# Altium PCB 100x100_3_czujniki_busbar.PcbDoc
Units mm, origin at the board's own origin, x right, y up, seen from the top; angles counter-clockwise.
Board outline 100 x 100 mm, 2 copper layers (Top Layer, Bottom Layer), stack 1.571 mm thick; 24 components, 15 nets, 94 pads, 12 vias.
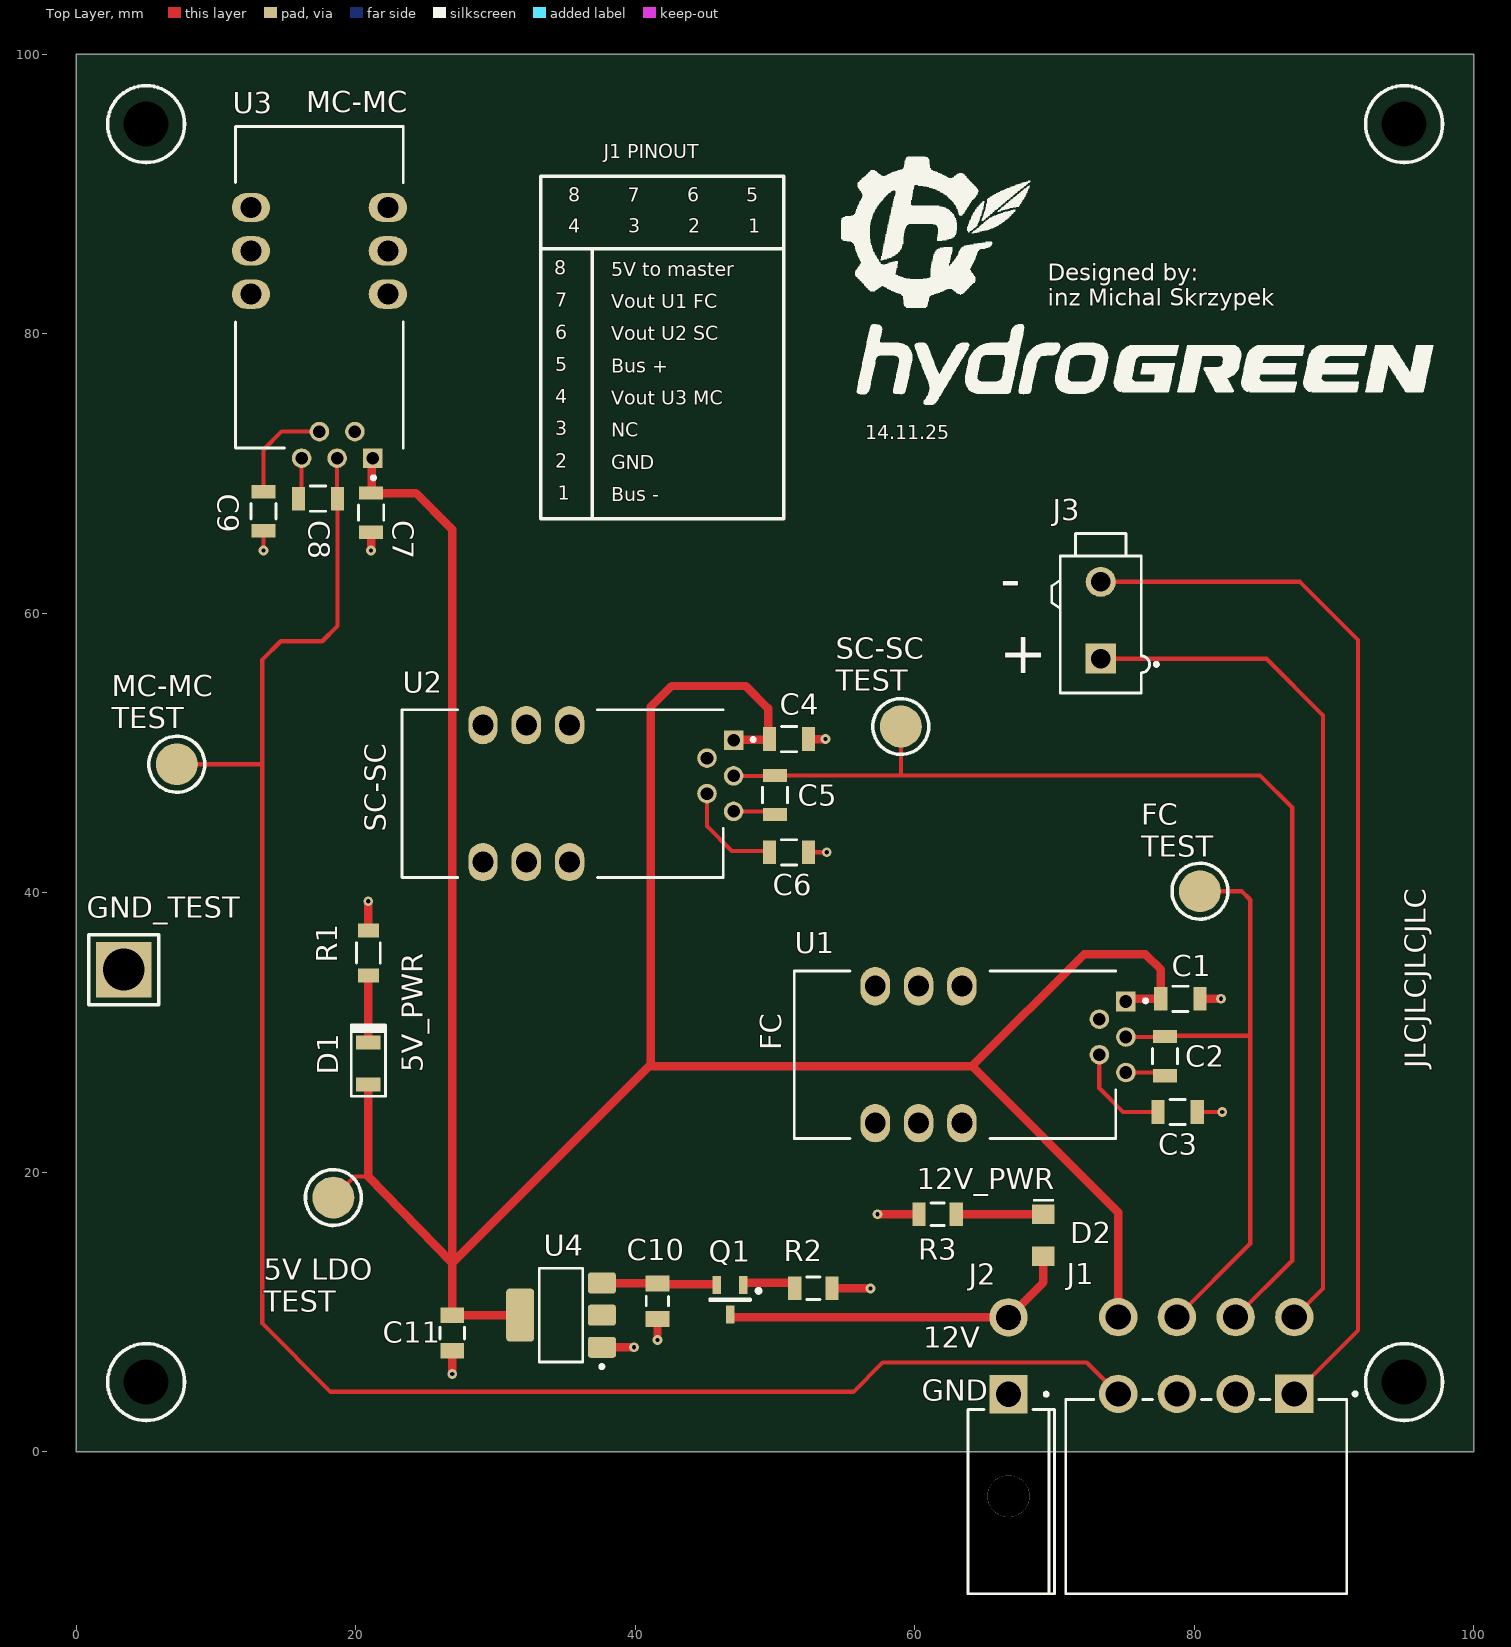
[diagram p0: Top Layer view]
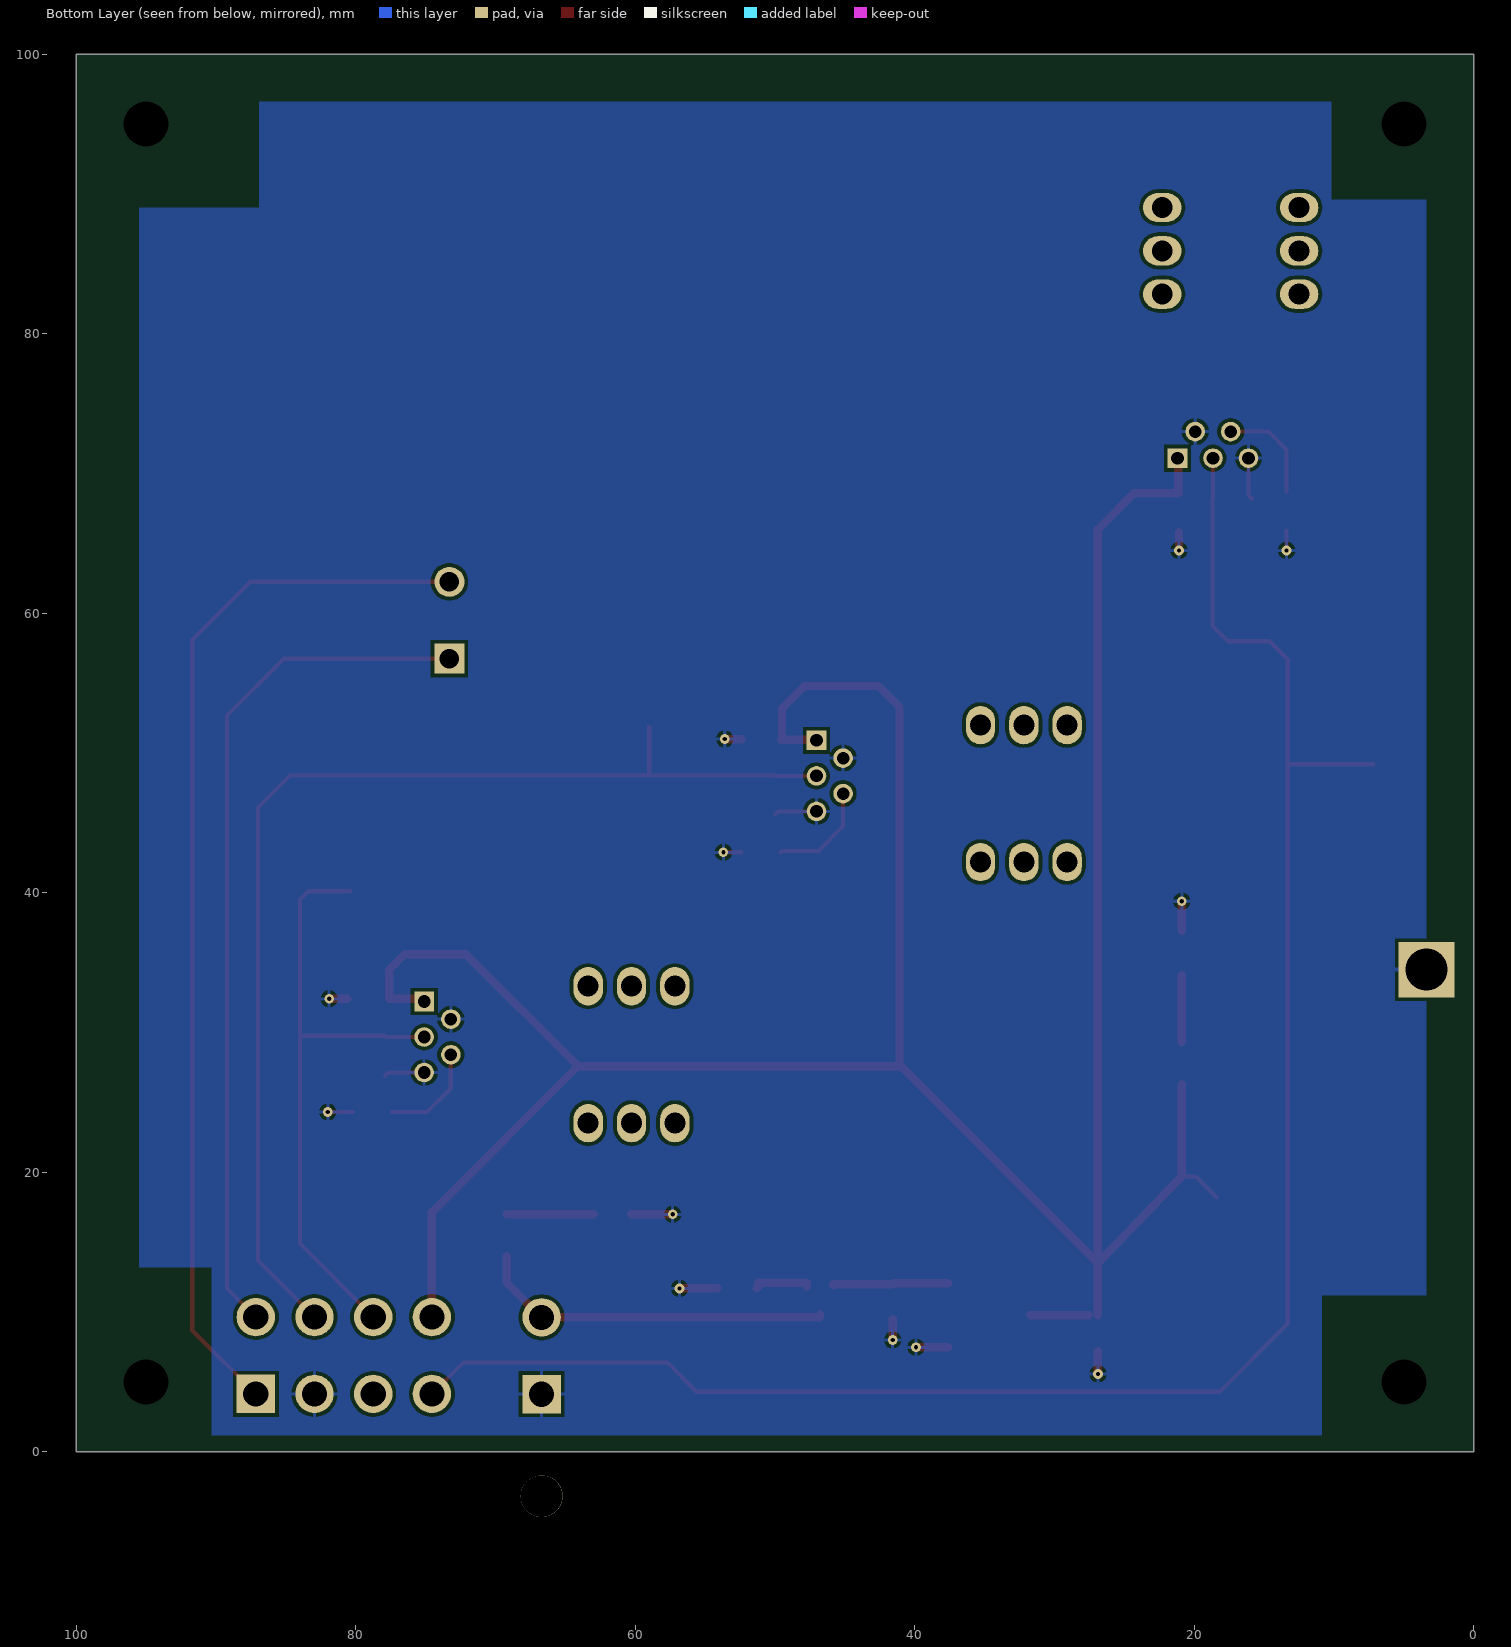
[diagram p1: Bottom Layer view, seen from below]
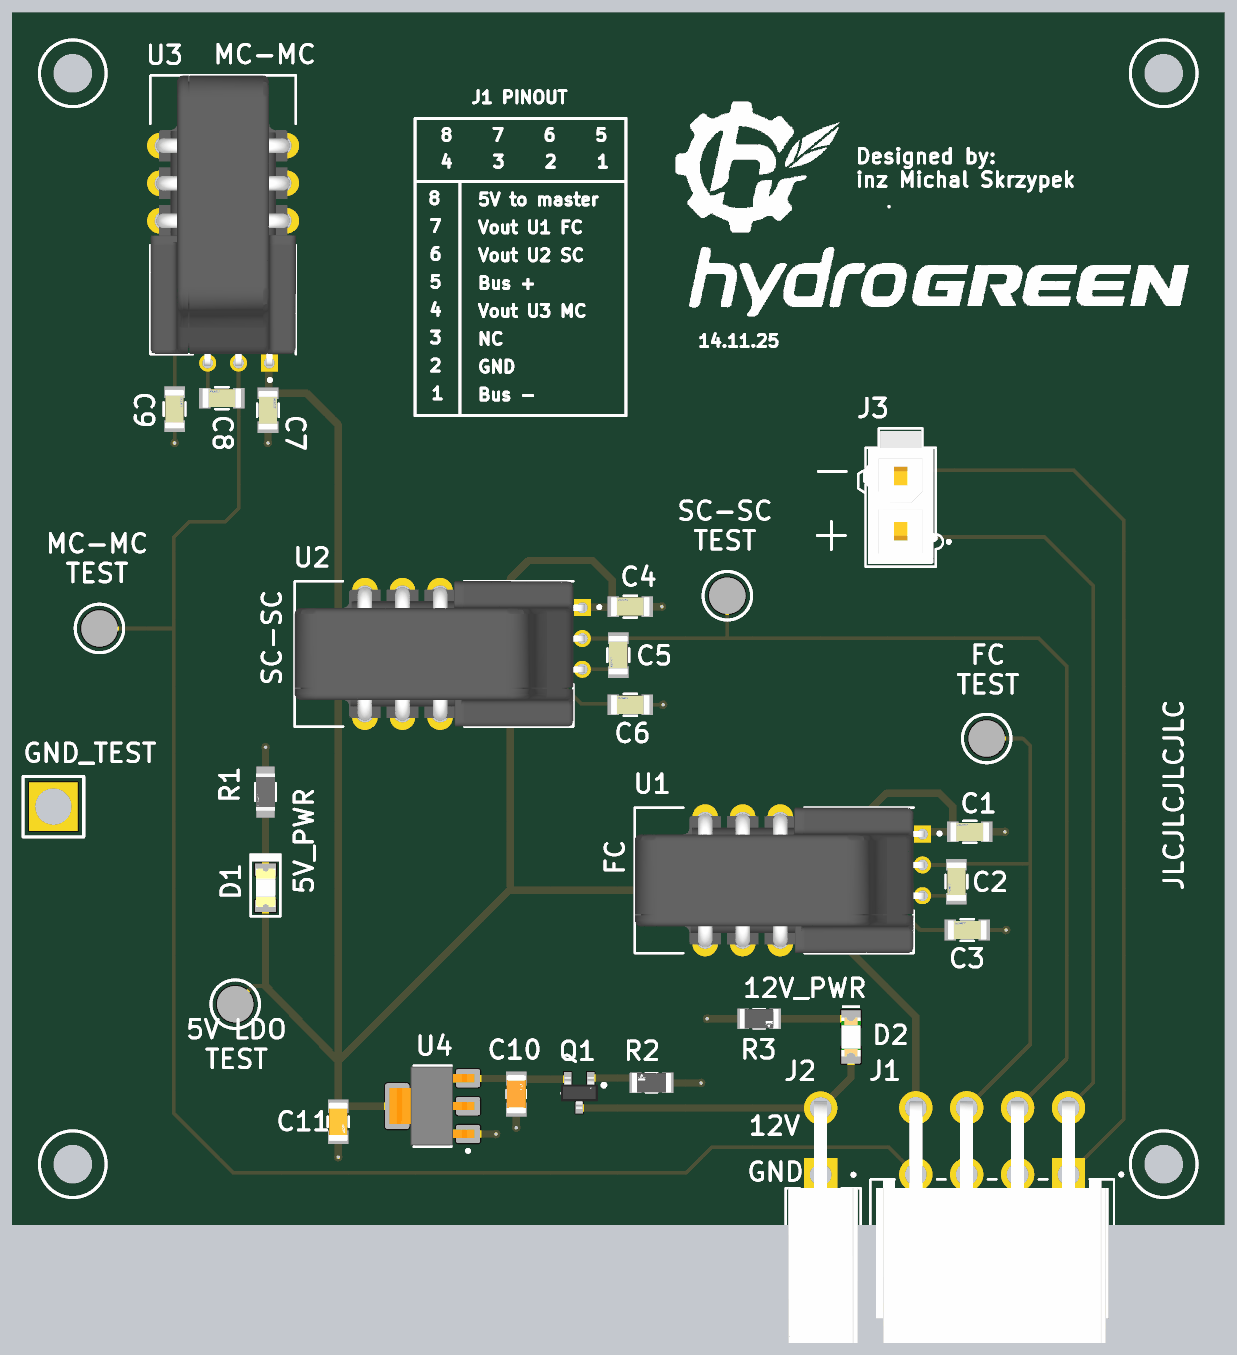
[diagram p2: 3D render of the assembled board from above, using the file's embedded part models]

## Layer stack, top to bottom
Top Solder: solder mask 0.0102, Solder Resist, Dk 3.5
Top Layer: signal copper 0.0356
Dielectric 1: dielectric 1.5, FR-4, Dk 4.8
Bottom Layer: signal copper 0.0356
Bottom Solder: solder mask 0.0102, Solder Resist, Dk 3.5

## Board outline
0,0 0,100 100,100 100,0

## Design rules (kind name [scope] priority, off if disabled: settings)
Clearance [All] p1: gap=0.254 ignorepadtopadclearanceinfootprint=FALSE
PolygonConnect [All] p1: connectstyle=Relief reliefconductorwidth=0.254 reliefentries=4 polygonreliefangle="90 Angle" airgapwidth=0.254
RoutingVias [All] p1: holewidth=0.3 width=0.7 viastyle="Through Hole" minholewidth=0.3 minwidth=0.7 maxholewidth=0.6 maxwidth=1.4
SolderMaskExpansion [All] p1: expansion=0.102 istentingtop=FALSE
SupplyNets "Schematic Supply Nets" [InNet('+12')] p1: voltage=0.000
SupplyNets "Schematic Supply Nets_3" [InNet('GND')] p2: voltage=0.000
Width [All] p1: maxlimit=0.6 minlimit=0.1 preferedwidth=0.3
30 further rules are at their usual default settings.

## Components (designator, comment, footprint, x,y, rotation, side; value= is the part's Value field where it differs from the comment)
C1 "47nF" FP-C1206C-EB-MFG 78.998,32.418 r0 top value="47,000 pF"
C2 "4.7 nF" FP-C1206C-EB-MFG 77.898,28.318 r90 top value="4,700 pF"
C3 "47nF" FP-C1206C-EB-MFG 78.798,24.318 r0 top value="47,000 pF"
C4 "47nF" FP-C1206C-EB-MFG 51,51 r0 top value="47,000 pF"
C5 "4.7 nF" FP-C1206C-EB-MFG 50,47 r90 top value="4,700 pF"
C6 "47nF" FP-C1206C-EB-MFG 51,42.9 r0 top value="47,000 pF"
C7 "47nF" FP-C1206C-EB-MFG 21.1,67.2 r270 top value="47,000 pF"
C8 "4.7 nF" FP-C1206C-EB-MFG 17.3,68.2 r0 top value="4,700 pF"
C9 "47nF" FP-C1206C-EB-MFG 13.4,67.3 r270 top value="47,000 pF"
C10 "10 uF" FP-CL31-IPC_C#1 41.585,10.787 r270 top value=10uF
C11 "22 uF" FP-CL31-IPC_C#2 26.9,8.5 r270 top
D1 "G_LED" LEDC3216X120N 20.9,27.8 r270 top
D2 "B_LED" WL-SMCW_1206_150120xx75000 69.2,15.5 r270 top
J1 "M-Fit-Jr 2x08" FP-87427-0802-MFG 80.85,-3 r0 top
J2 "M-Fit-Jr 2x01" FP-26-01-3114-MFG 66.901,-3.37 r0 top
J3 "M-Fit-Jr 2x01" FP-39-29-6028-MFG 73.3,60 r180 top
Q1 "GSF3407" GSF3407 46.785,10.887 r270 top
R1 "200" FP-AC1206-MFG 20.9,35.7 r270 top value=200Ω
R2 "750" FP-CRCW1206-e3-IPC_C 52.747,11.715 r180 top
R3 "750" FP-CRCW1206-e3-IPC_C 61.626,17 r0 top
U1 "HO 25-P" "HO 25-P" 62.868,28.418 r180 top
U2 "HO 25-P" "HO 25-P" 34.8,47.1 r180 top
U3 "HO 25-P" "HO 25-P" 17.4,83.33 r90 top
U4 "LDI1117-05H" LDI1117-05H 34.685,9.787 r180 top

## Footprints (in the part's own frame and the unit in brackets; to place one, negate y for a bottom-side part, rotate by r counter-clockwise, add the part's x,y. Pads: shape width x height; smd on the part's side, far side on the other; paste and mask are expansions set on the pad)
FP-26-01-3114-MFG [mm]
  rect 2.75x2.75 hole 1.8 paste-2539.97 mask+0: 1(-0.2,7.5)
  round 2.75 hole 1.8 paste-2539.97 mask+0: 2(-0.2,13)
  round 3 hole 3 unplated paste-2539.97 mask+0: ""(-0.2,0.2)
  silkscreen extent -3.09,-6.78 3.09,7.62, body extent -3.19,-6.88 3.19,14.48, height 0.25
FP-39-29-6028-MFG [mm]
  rect 2.15x2.15 hole 1.4 paste-2539.97 mask+0: 1(0,3.25)
  round 2.15 hole 1.4 paste-2539.97 mask+0: 2(0,-2.25)
  silkscreen extent -4.1,-5.7 3.5,5.7, body extent -3.6,-5.8 3.6,5.8, height 0.25
FP-87427-0802-MFG [mm]
  rect 2.75x2.75 hole 1.8 paste-2539.97 mask+0: 1(6.3,7.15)
  round 2.75 hole 1.8 paste-2539.97 mask+0: 2(2.1,7.15) 3(-2.1,7.15) 4(-6.3,7.15) 5(6.3,12.65) 6(2.1,12.65) 7(-2.1,12.65) 8(-6.3,12.65)
  silkscreen extent -10.05,-7.15 10.78,7.27, body extent -10.15,-7.25 10.15,14.13, height 0.25
FP-AC1206-MFG [mm]
  rect 1x1.5 smd paste+0 mask+0: 1(-1.6,0) 2(1.6,0)
  silkscreen extent -0.72,-0.85 0.72,0.85, body extent -2.2,-0.95 2.2,0.95, height 0.25
FP-C1206C-EB-MFG [mm]
  rect 0.95x1.7 smd paste+0 mask+0: 1(-1.4,0) 2(1.4,0)
  silkscreen extent -0.55,-0.9 0.55,0.9, body extent -2,-1 2,1, height 0.25
FP-CL31-IPC_C#1 [mm]
  rect 1.154x1.706 smd paste+0 mask+0: 1(-1.276,0) 2(1.276,0)
  silkscreen extent -0.32,-0.8 0.32,0.8, body extent -1.95,-1 1.95,1, height 0.25
FP-CL31-IPC_C#2 [mm]
  rect 1.105x1.658 smd paste+0 mask+0: 1(-1.276,0) 2(1.276,0)
  silkscreen extent -0.42,-0.87 0.42,0.87, body extent -1.93,-0.97 1.93,0.97, height 0.25
FP-CRCW1206-e3-IPC_C [mm]
  rect 0.956x1.658 smd paste+0 mask+0: 1(-1.326,0) 2(1.326,0)
  silkscreen extent -0.47,-0.8 0.47,0.8, body extent -1.9,-0.97 1.9,0.97, height 0.25
GSF3407 [mm] "P-Channel 30 V 4.1A (Ta) 1.2W (Ta) Surface Mount SOT-23"
  rect 1.3x0.6 smd: 1(-1.05,0.95) 2(-1.05,-0.95) 3(1.05,0)
  silkscreen extent -0.76,-1.46 0.05,2.16, body extent -1.32,-1.52 1.32,1.52, height 1.12
"HO 25-P" [mm] "Current Sensor 25A 1 Channel Hall Effect, Open Loop Bidirectional Module, Single Pass Through"
  rect 1.4x1.4 hole 0.9 paste-2539.97 mask+0: 1(-12.235,-3.81)
  round 1.4 hole 0.9 paste-2539.97 mask+0: 2(-10.33,-2.54) 3(-12.235,-1.27) 4(-10.33,0) 5(-12.235,1.27)
  rrect100% 2.1x2.74 hole 1.5 paste-2539.97 mask+0: 6(-0.5,4.9) 7(2.6,4.9) 8(5.7,4.9) 9(-0.5,-4.9) 10(2.6,-4.9) 11(5.7,-4.9)
  silkscreen extent -13.76,-6 11.5,6, body extent -13.03,-6.37 11.6,6.37, height 0.25
LDI1117-05H [mm] "SOT223, 4-Leads"
  rrect25% 2x1.5 smd: 1(-2.925,2.3) 2(-2.925,0) 3(-2.925,-2.3)
  rrect25% 2x3.8 smd: 4(2.925,0)
  silkscreen extent -3.05,-3.35 1.55,3.81, body extent -3.44,-3.26 3.56,3.24, height 1.64
LEDC3216X120N [mm]
  rect 1x1.75 smd: 1(1.5,0) 2(-1.5,0)
  silkscreen extent -2.75,-1.22 2.35,1.22, body extent -1.6,-0.79 1.6,0.81, height 1.1
WL-SMCW_1206_150120xx75000 [mm] "SMD Mono-color Chip LED, body 3.2x1.6mm"
  rect 1.4x1.6 smd: 1(-1.5,0) 2(1.5,0)
  silkscreen extent -2.6,-0.75 -2.4,0.75, body extent -1.6,-0.8 1.6,0.8, height 0.68

## Part data
C1 C3 C4 C6 C7 C9: library part CMP-1037-03993-2, "0.047 µF ±5% 100V Ceramic Capacitor X7R 1206 (3216 Metric) C1206C473J1RACTU", Capacitance="47,000 pF", Manufacturer=KEMET, Manufacturer Part Number=C1206C473J1RACTU, Package=C1206C-EB, Temperature="-55°C to +150°C", Temperature Characteristic=X7R, Temperature Coefficient=15%, Temperature Range High=+150°C, Temperature Range Low=-55°C, Tolerance=0.05, Voltage Rating="100 V", Automotive=Yes, Automotive Grade="Grade 0", Category=Cap, ComponentLink2Description=Datasheet, ComponentLink2URL=https://content.kemet.com/datasheets/KEM_C1007_X8R_ULTRA_150C_SMD.pdf, Device Class L1="Passive Components", Device Class L2=Capacitors, Device Class L3="Ceramic Capacitors", Digikey Description="CAP CER 0.047UF 100V X7R 1206", Height=0.88mm, Ipc Land Pattern Name=CAPC320160X78, Lead Free=Yes, Material=Ceramic, Mouser Description="Multilayer Ceramic Capacitors MLCC - SMD/SMT 100volts 47000pF X7R 5%", Octopart=https://octopart.com/c1206c473j1ractu-kemet-8206881, RoHS=TRUE
C2 C5 C8: library part CMP-03020-033478-1, "4700 pF ±5% 100V Ceramic Capacitor X7R 1206 (3216 Metric) C1206C472J1RACTU", Capacitance="4,700 pF", Manufacturer=KEMET, Manufacturer Part Number=C1206C472J1RACTU, Package=C1206C-EB, Temperature="-55°C to +150°C", Temperature Characteristic=X7R, Temperature Coefficient=15%, Temperature Range High=+150°C, Temperature Range Low=-55°C, Tolerance=0.05, Voltage Rating="100 V", Automotive=Yes, Automotive Grade="Grade 0", Category=Cap, ComponentLink2Description=Datasheet, ComponentLink2URL=https://content.kemet.com/datasheets/KEM_C1007_X8R_ULTRA_150C_SMD.pdf, Device Class L1="Passive Components", Device Class L2=Capacitors, Device Class L3="Ceramic Capacitors", Digikey Description="CAP CER 4700PF 100V X7R 1206", Height=0.88mm, Ipc Land Pattern Name=CAPC320160X78, Lead Free=Yes, Material=Ceramic, Mouser Description="Multilayer Ceramic Capacitors MLCC - SMD/SMT 100volts 4700pF X7R 5%", Octopart=https://octopart.com/c1206c472j1ractu-kemet-4496506, RoHS=TRUE
C10: library part CMP-13271-000016-1, "10 µF ±10% 50V Ceramic Capacitor X5R 1206 (3216 Metric), CL31A106KBHNNNE", Capacitance=10uF, Manufacturer=Samsung, Manufacturer Part Number=CL31A106KBHNNNE, Package=CL31, Temperature="-55°C to +85°C", Temperature Characteristic=X5R, Temperature Coefficient=15%, Temperature Range High=+85°C, Temperature Range Low=-55°C, Tolerance=10%, Voltage=50V, Automotive=No, Category=Cap, ComponentLink2Description=Datasheet, ComponentLink2URL=http://www.samsungsem.com/kr/support/product-search/mlcc/__icsFiles/afieldfile/2018/06/21/CL31A106KBHNNNE.pdf, Device Class L1="Passive Components", Device Class L2=Capacitors, Device Class L3="Ceramic Capacitors", Digikey Description="CAP CER 10UF 50V X5R 1206", Height=1.8mm, Ipc Land Pattern Name=CAPC320160X160, Lead Free=Yes, Material=Ceramic, Octopart=https://octopart.com/cl31a106kbhnnne-samsung-19832778, RoHS=TRUE, Voltage Rating=50V
C11: library part CMP-13271-002604-1, "22 µF ±10% 16V Ceramic Capacitor X5R 1206 (3216 Metric), CL31A226KOHNNNE", Capacitance=22uF, Case Code (Imperial)=1206, Case Code (Metric)=3216, Dielectric=X5R, Max Operating Temperature=85°C, Min Operating Temperature=-55°C, Package Quantity=1, Tolerance=10%, Voltage Rating=16V, Case/Package=1206, Depth=1.6mm, Height=1.6mm, Lead Free="Lead Free", Length=3.2mm, Mount="Surface Mount", Packaging="Tape and Reel", Radiation Hardening=No, Thickness=0.071inch, Voltage Rating (DC)=16V, Width=0.063inch
D1: library part LTST-C230KGKT, "Green 571nm LED Indication - Discrete 2V 1206 (3216 Metric)", Case Code (Imperial)=1206, Case Code (Metric)=3216, Color=Green, Forward Current=30mA, Forward Voltage=2V, Lens Color="Clear, Colorless", Manufacturer=Lite-On, Max Operating Temperature=85°C, Min Operating Temperature=-55°C, Power Dissipation=75mW, Reverse Voltage=5V, Supplier Part Number=6921105P, Supplier Part Number 1=160-1456-1-ND, Test Current=20mA, Case/Package=1206, Category=LEDs, China RoHS=Compliant, ComponentLink1Description=https://datasheet.octopart.com:443/LTST-C230KGKT-Lite-On-datasheet-43775839.pdf?src-supplier=ODG+(Origin+Data+Global), ComponentLink1URL=https://datasheet.octopart.com:443/LTST-C230KGKT-Lite-On-datasheet-43775839.pdf?src-supplier=ODG+(Origin+Data+Global), ComponentLink2Description=https://datasheet.octopart.com:443/LTST-C230KGKT-Lite-On-datasheet-158343.pdf?src-supplier=Jameco, ComponentLink2URL=https://datasheet.octopart.com:443/LTST-C230KGKT-Lite-On-datasheet-158343.pdf?src-supplier=Jameco, ComponentLink3Description=https://datasheet.octopart.com:443/LTST-C230KGKT-Lite-On-datasheet-83115.pdf?src-supplier=Future+Electronics, ComponentLink3URL=https://datasheet.octopart.com:443/LTST-C230KGKT-Lite-On-datasheet-83115.pdf?src-supplier=Future+Electronics, ComponentLink4Description=https://datasheet.octopart.com:443/LTST-C230KGKT-Lite-On-datasheet-26684764.pdf?src-supplier=Future+Electronics, ComponentLink4URL=https://datasheet.octopart.com:443/LTST-C230KGKT-Lite-On-datasheet-26684764.pdf?src-supplier=Future+Electronics, ComponentLink5Description=https://datasheet.octopart.com:443/LTST-C230KGKT-Lite-On-datasheet-165573808.pdf?src-supplier=TME, ComponentLink5URL=https://datasheet.octopart.com:443/LTST-C230KGKT-Lite-On-datasheet-165573808.pdf?src-supplier=TME, ComponentLink6Description=https://datasheet.octopart.com:443/LTST-C230KGKT-Lite-On-datasheet-13697501.pdf?src-supplier=_legacy+Avnet, ComponentLink6URL=https://datasheet.octopart.com:443/LTST-C230KGKT-Lite-On-datasheet-13697501.pdf?src-supplier=_legacy+Avnet, ComponentLink7Description=https://datasheet.octopart.com:443/LTST-C230KGKT-Lite-On-datasheet-11795789.pdf?src-supplier=Arrow+Electronics, ComponentLink7URL=https://datasheet.octopart.com:443/LTST-C230KGKT-Lite-On-datasheet-11795789.pdf?src-supplier=Arrow+Electronics, Depth=1.6mm, Dominant Wavelength=571nm, Height=1.1mm, Illumination Color=Green, Lead Free="Lead Free", Length=3.2mm, Lens Style=Clear, Lens Transparency=Clear, Lifecycle Status=Production, Luminous Intensity=35mcd, Manufacturer Part Number=LTST-C230KGKT, Mounting Technology="Surface Mount", Number of Circuits=1, Number of Elements=1, Number of LEDs=1, Number of Terminals=2, Peak Wavelength=574nm, Power Rating=75mW, Radiation Hardening=No, REACH SVHC=Yes, RoHS=Compliant, Schedule B="8541402000, 8541402000|8541402000, 8541402000|8541402000|8541402000, 8541402000|8541402000|8541402000|8541402000", Shape=Rectangular, Stock=6300, Supplier=RS, Supplier 1=DigiKey, Terminal Pitch=3.6mm, Viewing Angle=130°, Wavelength=574nm, Width=1.6mm
D2: library part CMP-1426-00015-3, "Blue 470nm LED Indication - Discrete 3.2V 1206 (3216 Metric), 150120BS75000", Case Code (Imperial)=1206, Case Code (Metric)=3216, Color=Blue, Forward Current=100mA, Forward Voltage=3.2V, Manufacturer Package Identifier=LED_1206, Max Operating Temperature=85°C, Max Reverse Voltage (DC)=5V, Min Operating Temperature=-40°C, Test Current=20mA, Case/Package=1206, Dominant Wavelength=470nm, Height=680µm, Length=3.2mm, Lens Style="Clear, Rectangular", Luminous Intensity=145mcd, Mount="Surface Mount", Packaging="Tape and Reel", Peak Wavelength=465nm, REACH SVHC=Unknown, RoHS=Compliant, Viewing Angle=140°, Wavelength=470nm, Width=1.6mm
J1: library part CMP-00257-00773328-1, "Connector Header Through Hole, Right Angle 8 position 0.165\" (4.20mm) 87427-0802", Case/Package=0802, Color=Natural, Current Rating=8A, Flammability Rating="UL94 V-0", Insulation Resistance=1GΩ, Manufacturer Lifecycle Status=ACTIVE, Max Operating Temperature=105°C, Min Operating Temperature=-40°C, Voltage Rating=600V, Contact Gender=Male, Contact Material=Brass, Contact Plating=Tin, Country of Origin=IN, Depth=19.4mm, Gender=Male, Glow Wire Compliant=Non-compliant, Housing Material=Nylon, Lead Pitch=4.2mm, Length=19.2mm, Lifecycle Status=Production, Mount="Through Hole", NexarPartId=773328, Number of Circuits=8, Number of Contacts=8, Number of Pins=8, Number of Ports=1, Number of Positions=8, Number of Rows=2, Number of Terminals=8, Orientation="Right Angle, Vertical", Pitch=4.2mm, Plating=Tin, Radiation Hardening=No, REACH SVHC=Unknown, RoHS=Compliant, Row Spacing=4.2mm, Schedule B=8536694040, Termination=Solder, Voltage Rating (DC)=600V
J2: library part CMP-04776-000291-1, "Connector Header Through Hole, Right Angle 2 position, molex mini fit jr 26-01-3114", Current Rating=13A, Flammability Rating="UL94 V-2", Max Operating Temperature=105°C, Min Operating Temperature=-40°C, Package Quantity=2280, Voltage Rating=600V, Contact Gender=Male, Contact Material=Brass, Contact Plating=Gold, Depth=19.93mm, ELV=Compliant, Halogen Free="Low Halogen", Housing Material=Nylon, Length=5.4mm, Material=Brass, Mount="Through Hole", Number of Ports=1, Number of Positions=2, Number of Rows=2, Number of Terminals/Pins=2, Orientation="Right Angle", Packaging=Bulk, Pitch=4.2mm, Row Spacing=4.2mm, Series=5569, Termination="Through Hole"
J3: library part CMP-04776-000768-1, "39-29-6028 Connector Header Through Hole 2 position", Contact Resistance=10mR, Current Rating=9A, Max Operating Temperature=105°C, Max Voltage Rating (DC)=600.6kV, Min Operating Temperature=-40°C, Voltage Rating=600V, Contact Gender=Male, Contact Material=Brass, Contact Plating=Gold, Gender=Male, Glow Wire Compliant=Non-compliant, Halogen Free="Low Halogen", Housing Material=Nylon, Lead Free="Lead Free", Mount="Through Hole", Number of Circuits=2, Number of Contacts=2, Number of Positions=2, Number of Rows=2, Orientation=Straight, Packaging=Bulk, Pitch=4.2mm, Radiation Hardening=No, Row Spacing=4.2mm, Series="Mini-Fit Jr.", Termination=Solder
Q1: "Mosfet, P-ch, Single, -4.1A, -30", Manufacturer=Good-Ark, Supplier Part Number=4786-GSF3407CT-ND, Category=MOSFETs, Manufacturer Part Number=GSF3407, Pricing="1=0,1, 10=0,064, 25=0,0564, 100=0,0471, 250=0,0428, 500=0,0402, 1000=0,03806 (USD)", Stock=10489, Supplier=DigiKey
R1: library part CMP-03412-013792-1, "200 Ohms ±1% 0.25W, 1/4W Chip Resistor 1206 (3216 Metric) Automotive AEC-Q200, Moisture Resistant Thick Film AC1206FR-07200RL", Manufacturer=Yageo, Manufacturer Part Number=AC1206FR-07200RL, Package=AC1206, Power Rating=0.25W, Resistance=200Ω, Temperature="-55°C to +155°C", Temperature Range High=+155°C, Temperature Range Low=-55°C, Tolerance=0.01, Voltage Rating=200V, Automotive=Yes, Automotive Grade="Grade 0", Category=Res, ComponentLink2Description=Datasheet, ComponentLink2URL=http://www.yageo.com/NewPortal/yageodocoutput?fileName=/pdf/R-Chip/PYu-AC_51_RoHS_L_6.pdf, Composition="Thick Film", Device Class L1="Passive Components", Device Class L2=Resistors, Device Class L3="Chip SMD Resistors", Digikey Description="RES SMD 200 OHM 1% 1/4W 1206", Footprint Url=http://www.yageo.com/exep/pages/download/literatures/PYu-R_Mount_10.pdf, Height=0.65mm, Ipc Land Pattern Name=RESC310160X55, Lead Free=Yes, Mouser Description="Thick Film Resistors - SMD 1/4W 200ohm 1% AEC-Q200", Octopart=https://octopart.com/ac1206fr-07200rl-yageo-30511076, RoHS=TRUE, Series=AC
R2 R3: library part CMP-2003-02375-2, "750 Ohms ±5% 0.25W, 1/4W Chip Resistor 1206 (3216 Metric) Automotive AEC-Q200 Thick Film, CRCW1206750RJNEA", Case Code (Imperial)=1206, Case Code (Metric)=3216, Max Operating Temperature=155°C, Max Power Dissipation=250mW, Min Operating Temperature=-55°C, Package Quantity=1, Resistance=750R, Temperature Coefficient=200ppm/°C, Tolerance=5%, Voltage Rating=200V, Case/Package=1206, Composition="Thick Film", Contact Plating=Tin, Depth=1.6mm, Features="Automotive AEC-Q200", Height=0.024inch, Lead Free="Lead Free", Length=3.2mm, Military Standard=Not, Mount="Surface Mount", Number of Terminations=2, Packaging="Tape and Reel", Power Rating=250mW, Radiation Hardening=No, Voltage Rating (DC)=200V, Weight=0.000353oz, Width=0.063inch
U1 U2 U3: library part CMP-010-00025-1, "Open Loop Current Sensor AC/DC Current 5V Automotive", Current Sensing=25A, Frequency=250kHz, Max Operating Temperature=105°C, Max Supply Current=25mA, Max Supply Voltage (DC)=5.5V, Min Operating Temperature=-40°C, Min Supply Voltage (DC)=4.5V, Accuracy=1.4%, Lifecycle Status=Production, Linearity=0.5%, Mounting Technology="Through Hole", Number of Channels=1, Polarity=Bidirectional, REACH SVHC=Yes, Response Time=3.5µs, RoHS=Compliant
U4: "Fixed Positive LDO Regulator", Manufacturer=Diotec, Supplier Part Number=4553249, Category="Voltage Regulators - Linear", ComponentLink1Description=http://datasheet.octopart.com/LDI1117-05H-Diotec-datasheet-154607892.pdf?src-supplier=Mouser, ComponentLink1URL=http://datasheet.octopart.com/LDI1117-05H-Diotec-datasheet-154607892.pdf?src-supplier=Mouser, ComponentLink2Description=http://datasheet.octopart.com/LDI1117-05H-Diotec-datasheet-154607892.pdf?src-supplier=Distrelec, ComponentLink2URL=http://datasheet.octopart.com/LDI1117-05H-Diotec-datasheet-154607892.pdf?src-supplier=Distrelec, ComponentLink3Description=http://datasheet.octopart.com/LDI1117-05H-Diotec-datasheet-154607892.pdf?src-supplier=Onlinecomponents.com, ComponentLink3URL=http://datasheet.octopart.com/LDI1117-05H-Diotec-datasheet-154607892.pdf?src-supplier=Onlinecomponents.com, ComponentLink4Description=http://datasheet.octopart.com/LDI1117-05H-Diotec-datasheet-154607892.pdf?src-supplier=DComponents, ComponentLink4URL=http://datasheet.octopart.com/LDI1117-05H-Diotec-datasheet-154607892.pdf?src-supplier=DComponents, ComponentLink5Description=https://datasheet.octopart.com/LDI1117-05H-Diotec-datasheet-154607892.pdf?src-supplier=TME, ComponentLink5URL=https://datasheet.octopart.com/LDI1117-05H-Diotec-datasheet-154607892.pdf?src-supplier=TME, ComponentLink6Description=https://datasheet.octopart.com/LDI1117-05H-Diotec-datasheet-159101088.pdf?src-supplier=SOS+electronic, ComponentLink6URL=https://datasheet.octopart.com/LDI1117-05H-Diotec-datasheet-159101088.pdf?src-supplier=SOS+electronic, ComponentLink7Description=http://datasheet.octopart.com/LDI1117-05H-Diotec-datasheet-154607892.pdf?src-supplier=Electro+Sonic, ComponentLink7URL=http://datasheet.octopart.com/LDI1117-05H-Diotec-datasheet-154607892.pdf?src-supplier=Electro+Sonic, ComponentLink8Description=https://datasheet.octopart.com/LDI1117-05H-Diotec-datasheet-189099648.pdf?src-supplier=Master+Electronics, ComponentLink8URL=https://datasheet.octopart.com/LDI1117-05H-Diotec-datasheet-189099648.pdf?src-supplier=Master+Electronics, Manufacturer Part Number=LDI1117-05H, RoHS=No, RoHS Compliant=Yes, Stock=720, Supplier=Farnell

## Free pads (board coordinates)
  rect 4x4 hole 3: ""(3.4,34.5)
  round 0 hole 3.2 unplated: ""(5,5) ""(5,95) ""(95,5) ""(95,95)
  round 3 smd: ""(7.2,49.2) ""(18.4,18.2) ""(59,51.9) ""(80.398,40.118)

## Via types
v1: diameter 0.7, hole 0.3, Top Layer to Bottom Layer, tented both sides, 12 vias

## Nets (pads, with @x,y where several pads share a name; then routed paths per layer and width w, separated by ;. In a path a pad name is that pad's centre, name@x,y a point inside that pad or via, vN(x,y) a via of type N, cw(c..) or ccw(c..) an arc to the next point about the centre after c; other vN are vias at no path point)
"5V LDO": C1.1 C4.1 C7.1 C11.1 D1.1 J1.8 pad.@18.4,18.2 U1.1 U2.1 U3.1 U4.4 | length 215.5
  Top Layer w0.3: pad.@18.4,18.2 19.9,19.7 20.9,19.7
  Top Layer w0.6: D1.1 20.9,19.7 26.9,13.5 ; U3.1 21.155,71.04 21.155,68.655 C7.1 24.3,68.6 26.724,66.176 26.9,66 26.9,13.5 ; C11.1 26.9,13.5 ; C11.1@27.546,9.787 U4.4 ; 41.1,27.899 41.1,53.3 42.6,54.8 47.9,54.8 49.5,53.2 49.5,51.01 49.555,50.955 47.08,50.955 U2.1 ; J1.8 74.55,17.15 64.1,27.6 ; U1.1 75.103,32.418 C1.1 77.598,34.502 76.5,35.6 72.1,35.6 64.1,27.6 ; 26.9,13.5 41,27.6 64.1,27.6
+12: D2.2 J2.2 Q1.3 | length 25.5
  Top Layer w0.6: Q1.3@46.785,9.63 J2.2 69.2,12.129 D2.2 ; Q1.3@46.785,9.637 Q1.3
BB+: J1.5 J3.1 | length 61.5
  Top Layer w0.3: J3.1 85.15,56.75 89.2,52.7 89.2,11.7 J1.5
BB-: J1.1 J3.2 | length 76
  Top Layer w0.3: J3.2 87.55,62.25 91.7,58.1 91.7,8.7 J1.1
DATA_S1: C2.2 J1.7 pad.@80.398,40.118 U1.3 | length 44.8
  Top Layer w0.3: U1.3 77.868,29.688 C2.2 77.956,29.776 83.998,29.776 ; J1.7 83.998,14.898 83.998,29.776 ; pad.@80.398,40.118 83.382,40.118 83.998,39.502 83.998,29.776
DATA_S2: C5.2 J1.6 pad.@59,51.9 U2.3 | length 82.6
  Top Layer w0.3: U2.3 49.97,48.37 C5.2 59,48.4 ; pad.@59,51.9 59,48.4 ; J1.6 87,13.7 87,46.1 84.7,48.4 59,48.4
DATA_S3: C8.2 J1.4 pad.@7.2,49.2 U3.3 | length 137.1
  Top Layer w0.3: pad.@7.2,49.2 13.317,49.2 ; U3.3 18.67,68.23 C8.2 18.7,59.1 17.6,58 14.635,58 13.317,56.683 13.317,49.2 ; J1.4 72.3,6.4 57.7,6.4 55.6,4.3 18.196,4.3 13.317,9.179 13.317,49.2
GND: C1.2 C2.1 C3.2 C4.2 C5.1 C6.2 C7.2 C8.1 C9.2 C10.2 C11.2 J1.2 J2.1 pad.@3.4,34.5 R1.1 R2.1 R3.1 U1.2 U1.5 U2.2 U2.5 U3.2 U3.5 U4.1 | length 30.5
  Top Layer w0.3: v1(13.4,64.5) C9.2 ; C8.1 16.13,68.43 U3.5 ; U2.5 49.77,45.83 C5.1 ; C6.2 v1(53.7,42.9) ; U1.5 77.668,27.148 C2.1 ; C3.2 v1(81.998,24.318)
  Top Layer w0.6: R1.1 v1(20.9,39.4) ; v1(21.1,64.5) C7.2 ; v1(26.9,5.576) C11.2 ; U4.1 v1(39.916,7.487) v1@39.916,7.507 ; v1(41.585,8.007) C10.2 ; C4.2 v1(53.6,51) ; R2.1@54.116,11.707 54.116,11.715 R2.1@54.172,11.715 ; R2.1@54.172,11.7 v1(56.831,11.7) ; v1(57.326,17) R3.1 ; C1.2@80.598,32.418 v1(81.898,32.418)
NetC3_1: C3.1 U1.4 | length 7.3
  Top Layer w0.3: U1.4 73.198,26.018 74.898,24.318 C3.1
NetC6_1: C6.1 U2.4 | length 7.6
  Top Layer w0.3: U2.4 45.13,44.77 46.9,43 49.5,43 C6.1
NetC9_1: C9.1 U3.4 | length 7.5
  Top Layer w0.3: C9.1 13.4,71.7 14.7,73 U3.4
NetC10_1: C10.1 Q1.2 U4.3 | length 8.3
  Top Layer w0.6: U4.3 37.61,12.063 C10.1 41.648,12 45.835,12 Q1.2
NetD1_2: D1.2 R1.2 | length 4.8
  Top Layer w0.6: D1.2 R1.2
NetD2_1: D2.1 R3.2 | length 6.2
  Top Layer w0.6: R3.2 D2.1
NetQ1_1: Q1.1 R2.2 | length 3.7
  Top Layer w0.6: Q1.1@47.735,11.826 Q1.1 ; Q1.1@47.741,12.107 R2.2@51.216,12.107 ; R2.2@51.211,11.826 R2.2@51.322,11.715
pads on no net: J1.3 J2. U1.6 U1.7 U1.8 U1.9 U1.10 U1.11 U2.6 U2.7 U2.8 U2.9 U2.10 U2.11 U3.6 U3.7 U3.8 U3.9 U3.10 U3.11 U4.2

## Polygon pours and split planes (outlines as drawn)
GND on Bottom Layer "GND_L02_P000" (solid, pour order 0): 3.4,11.2 10.9,11.2 10.9,1.2 90.3,1.2 90.3,13.2 95.5,13.2 95.5,89 86.9,89 86.9,96.6 10.2,96.6 10.2,89.6 3.4,89.6

## Silkscreen, mask and mechanical layers (free items; w line width, h text height)
Top Overlay:
  drawing of 38 lines, arcs and shapes, not listed
  text "MC-MC" at 16.454,95.854 h1.52
  text "J1 PINOUT" at 37.754,92.554 h1
  text "8" at 35.189,89.438 h1
  text "7" at 39.445,89.438 h1
  text "6" at 43.7,89.438 h1
  text "5" at 47.956,89.438 h1
  text "4" at 35.189,87.238 h1
  text "3" at 39.489,87.238 h1
  text "2" at 43.789,87.238 h1
  text "1" at 48.089,87.238 h1
  text "8" at 34.189,84.221 h1
  text "5V to master" at 38.289,84.121 h1
  text "Designed by:  / inz Michal Skrzypek" at 69.5,82 h1.2
  text "7" at 34.289,81.921 h1
  text "Vout U1 FC" at 38.289,81.821 h1
  text "6" at 34.289,79.621 h1
  text "Vout U2 SC" at 38.289,79.521 h1
  text "5" at 34.289,77.321 h1
  text "Bus +" at 38.289,77.221 h1
  text "4" at 34.289,75.021 h1
  text "Vout U3 MC" at 38.289,74.921 h1
  text "3" at 34.289,72.721 h1
  text "NC" at 38.289,72.621 h1
  text "14.11.25" at 56.454,72.454 h1
  text "2" at 34.289,70.421 h1
  text "GND" at 38.289,70.321 h1
  text "1" at 34.456,68.121 h1
  text "Bus -" at 38.289,68.021 h1
  text "-" at 66.1,61 h3
  text "+" at 66.031,55.705 h3
  text "SC-SC / TEST" at 54.356,54.461 h1.52
  text "MC-MC / TEST" at 2.556,51.761 h1.52
  text "SC-SC" at 22.146,44.354 h1.52 r90
  text "FC / TEST" at 76.21,42.579 h1.52
  text "GND_TEST" at 0.754,38.208 h1.52
  text "FC" at 50.446,28.754 h1.52 r90
  text "JLCJLCJLCJLC" at 96.546,27.454 h1.52 r90
  text "5V_PWR" at 24.792,27.154 h1.52 r90
  text "12V_PWR" at 60.154,18.808 h1.52
  text "5V LDO / TEST" at 13.428,10.046 h1.52
  text "12V" at 60.614,7.456 h1.52
  text "GND" at 60.487,3.656 h1.52